# Altium PCB 贴锁按键板201106.PcbDoc
Units mm, origin at the board's own origin, x right, y up, seen from the top; angles counter-clockwise.
Board outline 36.47 x 9.37 mm, 2 copper layers (Top Layer, Bottom Layer); 3 components, 4 nets, 12 pads, 0 vias.
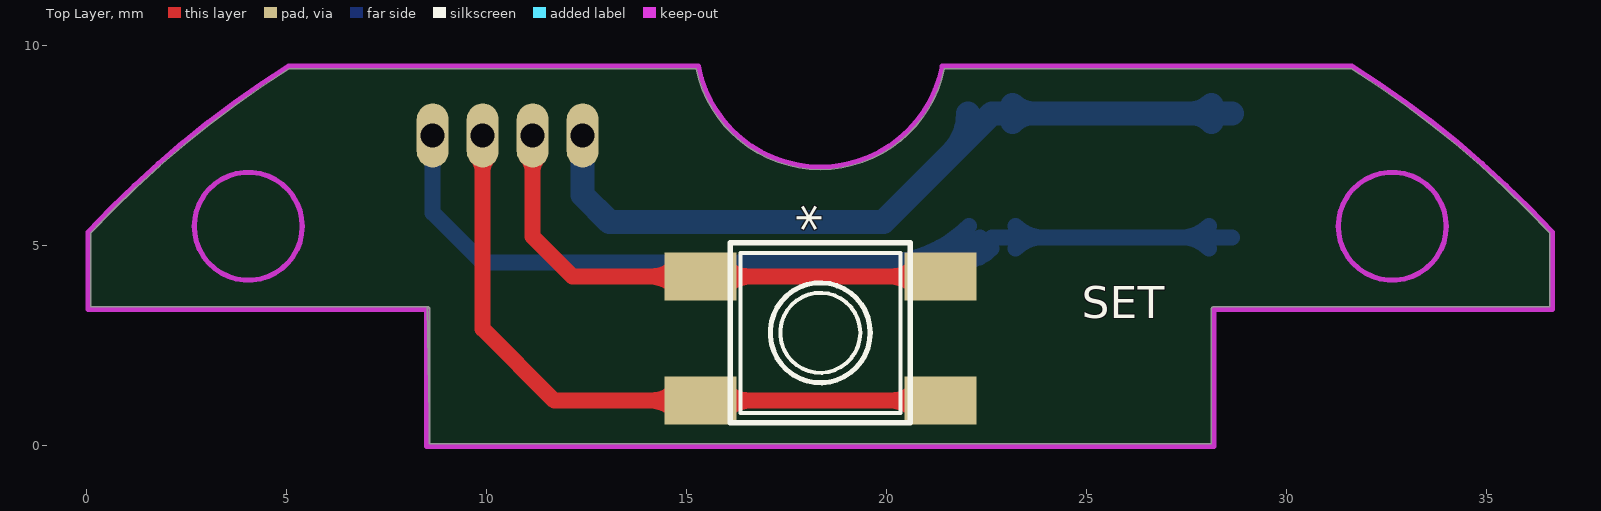
[diagram p0: Top Layer view]
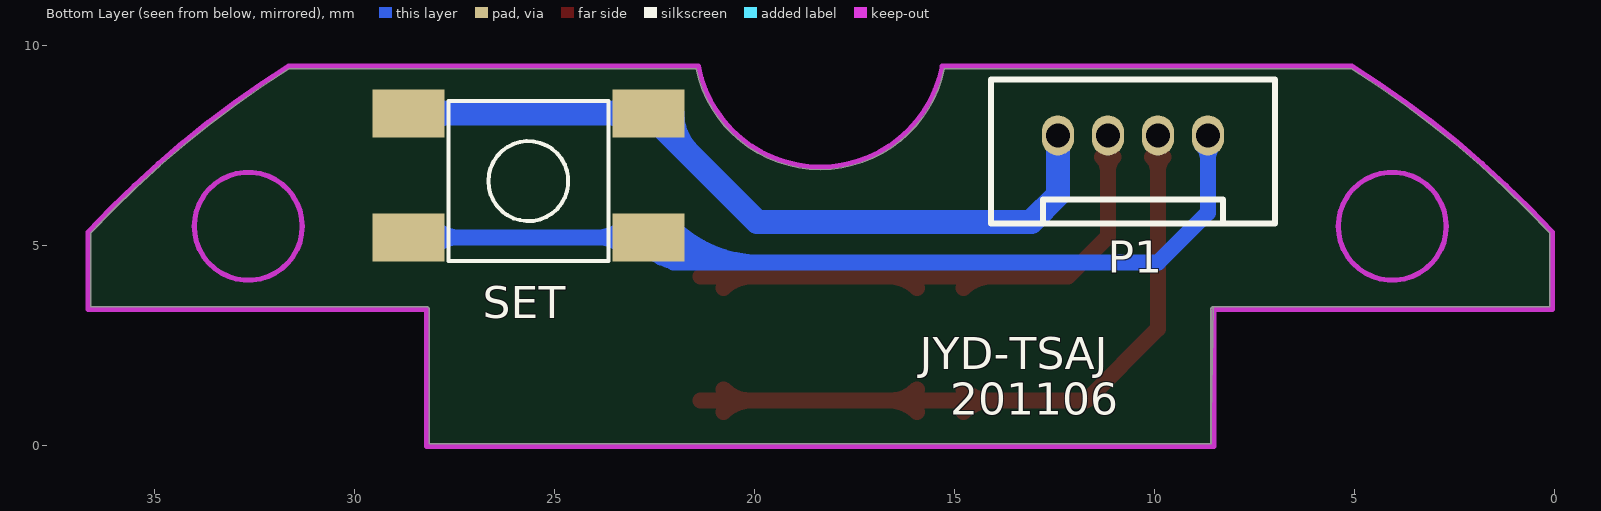
[diagram p1: Bottom Layer view, seen from below]

## Layer stack, top to bottom
Top Layer: signal copper 0.0356
Dielectric: dielectric 0.32, FR-4, Dk 4.8
Bottom Layer: signal copper 0.0356

## Board outline
8.597,0.04 8.597,3.4 cw(c8.533,3.4) 8.583,3.36 8.583,0.04 28.13,0.04 28.13,3.4 cw(c28.194,3.4) 28.187,3.464 cw(c28.194,3.4) 28.194,3.464 28.187,3.464 ccw(c28.18,3.4) 28.18,3.464 36.593,3.464 36.593,5.309 ccw(c18.356,-11.687) 31.633,9.412 21.458,9.412 cw(c18.356,10.063) 15.255,9.412 5.08,9.412 ccw(c18.356,-11.687) 0.12,5.309 0.12,3.464 8.533,3.464 ccw(c8.533,3.4) 8.526,3.464 ccw(c8.519,3.4) 8.519,3.464 8.526,3.464 cw(c8.519,3.4) 8.583,3.4 8.597,3.4 ccw(c8.533,3.4)

## Design rules (kind name [scope] priority, off if disabled: settings)
Clearance [All] p1: gap=0.15
HoleToHoleClearance [All] p1: gap=0 allowstackedmicrovias=TRUE
MinimumSolderMaskSliver [All] p1: minsoldermaskwidth=0
PolygonConnect [All] p1: connectstyle=Relief reliefconductorwidth=0.254 reliefentries=4 polygonreliefangle="90 Angle" airgapwidth=0.254
RoutingVias [All] p1: holewidth=0.711 width=1.27 viastyle="Through Hole" minholewidth=0.711 minwidth=1.27 maxholewidth=0.711 maxwidth=1.27
SilkToSilkClearance [All] p1: silktosilkclearance=0
SilkToSolderMaskClearance [IsPad] p1: minsilkscreentomaskgap=0 clearancetoexposedcopper=TRUE
SolderMaskExpansion [All] p1: expansion=0.102
Width [All] p1: maxlimit=2 minlimit=0.15 preferedwidth=0.2
24 further rules are at their usual default settings.

## Components (designator, comment, footprint, x,y, rotation, side; value= is the part's Value field where it differs from the comment)
* "SW" SW3 18.356,2.813 r180 top
P1 "按键板接口" 4P-1.25_1 10.541,7.747 r180 bottom
SET "SW" SW3 25.654,6.604 r180 bottom

## Footprints (in the part's own frame and the unit in brackets; to place one, negate y for a bottom-side part, rotate by r counter-clockwise, add the part's x,y. Pads: shape width x height; smd on the part's side, far side on the other; paste and mask are expansions set on the pad)
4P-1.25_1 [mm]
  oval 0.8x1 / inner oval 0.8x1.6 / far side oval 0.8x1.6 hole 0.6: 1(1.875,0) 2(0.625,0) 3(-0.625,0) 4(-1.875,0)
  silkscreen extent -3.55,-2.2 3.55,1.4
SW3 [mm]
  rect 1.8x1.2 smd: 1(-3,-1.403) 1(3,-1.403) 2(-3,1.697) 2(3,1.697)
  silkscreen extent -2,-2 2,2

## Part data
* SET: "Switch"
P1: library part "Header 4_1", "Header, 4-Pin"

## Nets (pads, with @x,y where several pads share a name; then routed paths per layer and width w, separated by ;. In a path a pad name is that pad's centre, name@x,y a point inside that pad or via, vN(x,y) a via of type N, cw(c..) or ccw(c..) an arc to the next point about the centre after c; other vN are vias at no path point)
GND: P1.4 SET.2 | length 22.5
  Bottom Layer w0.6: P1.4 12.416,6.253 13.081,5.588 19.939,5.588 22.652,8.301 22.654,8.301 SET.2@28.654,8.301 ; 21.631,7.28 ccw(c20.61,8.301) SET.2@22.054,8.301 ; SET.2@23.166,8.089 cw(c23.678,7.577) 23.678,8.301 cw(c23.678,9.025) SET.2@23.166,8.513 ; SET.2@28.142,8.089 ccw(c27.63,7.577) 27.63,8.301 ccw(c27.63,9.025) SET.2@28.142,8.513
KEYX_4: *.2 P1.2 | length 22.3
  Top Layer w0.4: P1.2@9.775,7.206 cw(c9.433,6.864) 9.916,6.864 cw(c10.399,6.864) P1.2@10.057,7.206 ; P1.2 9.916,2.911 11.711,1.116 15.356,1.116 *.2@21.356,1.116 ; *.2@14.773,0.833 ccw(c14.09,0.15) 14.09,1.116 ccw(c14.09,2.082) *.2@14.773,1.399 ; *.2@15.939,0.833 cw(c16.622,0.15) 16.622,1.116 cw(c16.622,2.082) *.2@15.939,1.399 ; *.2@20.773,0.833 ccw(c20.09,0.15) 20.09,1.116 ccw(c20.09,2.082) *.2@20.773,1.399
KEYY_3: *.1 P1.3 | length 18.4
  Top Layer w0.4: P1.3@11.025,7.206 cw(c10.683,6.864) 11.166,6.864 cw(c11.649,6.864) P1.3@11.307,7.206 ; P1.3 11.166,5.217 12.167,4.216 15.356,4.216 *.1@21.356,4.216 ; *.1@14.773,3.933 ccw(c14.09,3.25) 14.09,4.216 ccw(c14.09,5.182) *.1@14.773,4.499 ; *.1@15.939,3.933 cw(c16.622,3.25) 16.622,4.216 cw(c16.622,5.182) *.1@15.939,4.499 ; *.1@20.773,3.933 ccw(c20.09,3.25) 20.09,4.216 ccw(c20.09,5.182) *.1@20.773,4.499
RX2/SETKEY: P1.1 SET.1 | length 32
  Bottom Layer w0.4: P1.1@8.525,7.506 cw(c8.183,7.164) 8.666,7.164 cw(c9.149,7.164) P1.1@8.807,7.506 ; P1.1 8.666,5.812 9.906,4.572 22.025,4.572 22.654,5.201 SET.1@28.654,5.201 ; 19.87,4.572 ccw(c19.87,7.685) SET.1@22.071,5.484 ; 20.835,4.572 ccw(c20.835,6.72) SET.1@22.354,5.201 ; 21.801,4.572 ccw(c21.801,5.754) SET.1@22.637,4.918 ; 22.025,4.572 ccw(c21.826,4.771) SET.1@22.044,4.948 ; SET.1@23.237,4.918 cw(c23.92,4.235) 23.92,5.201 cw(c23.92,6.167) SET.1@23.237,5.484 ; SET.1@28.071,4.918 ccw(c27.388,4.235) 27.388,5.201 ccw(c27.388,6.167) SET.1@28.071,5.484

## Keep-outs
Keep-Out Layer:
  circle w0.127: c32.657,5.476 r1.35
  circle w0.127: c4.056,5.476 r1.35
  lines w0.127: 0.056,3.4 0.056,5.334 cw(c18.356,-11.687) 5.061,9.476 15.308,9.476 ccw(c18.356,10.063) 21.405,9.476 31.652,9.476 cw(c18.356,-11.687) 36.657,5.334 36.657,3.4 28.194,3.4 28.194,-0.024 8.519,-0.024 8.519,3.4 0.056,3.4

## Silkscreen, mask and mechanical layers (free items; w line width, h text height)
Top Overlay:
  circle w0.127: c18.356,2.813 r1.25
  lines w0.127: 16.106,0.563 16.106,5.063 20.606,5.063 20.606,0.563 16.106,0.563
  text "SET" at 24.892,3.175 h0.8
Bottom Overlay:
  text "JYD-TSAJ" at 15.875,1.905 h0.8
  text "201106" at 15.113,0.762 h0.8
Mechanical 3:
  lines w0.127: 8.519,3.4 8.533,3.4 8.533,-0.024 ; 28.18,-0.024 28.18,3.4 28.194,3.4 ; 0.056,3.4 0.057,3.4 ; 0.056,5.334 0.057,5.334 ; 5.061,9.476 5.061,9.476 ; 16.106,0.563 16.106,0.563 ; 16.106,5.063 16.106,5.063 ; 20.606,0.563 20.606,0.563 ; 20.606,5.063 20.606,5.063 ; 31.652,9.476 31.652,9.476 ; 36.657,3.4 36.657,3.4 ; 36.657,5.334 36.657,5.334